# Altium PCB Copy of 2019-07-31_19-54-44.PcbDoc
Units mil, origin at the board's own origin, x right, y up, seen from the top; angles counter-clockwise.
Board outline 1400 x 2000 mil, 4 copper layers (Top Layer, MidLayer1, MidLayer2, Bottom Layer); 12 components, 5 nets, 24 pads, 20 vias.
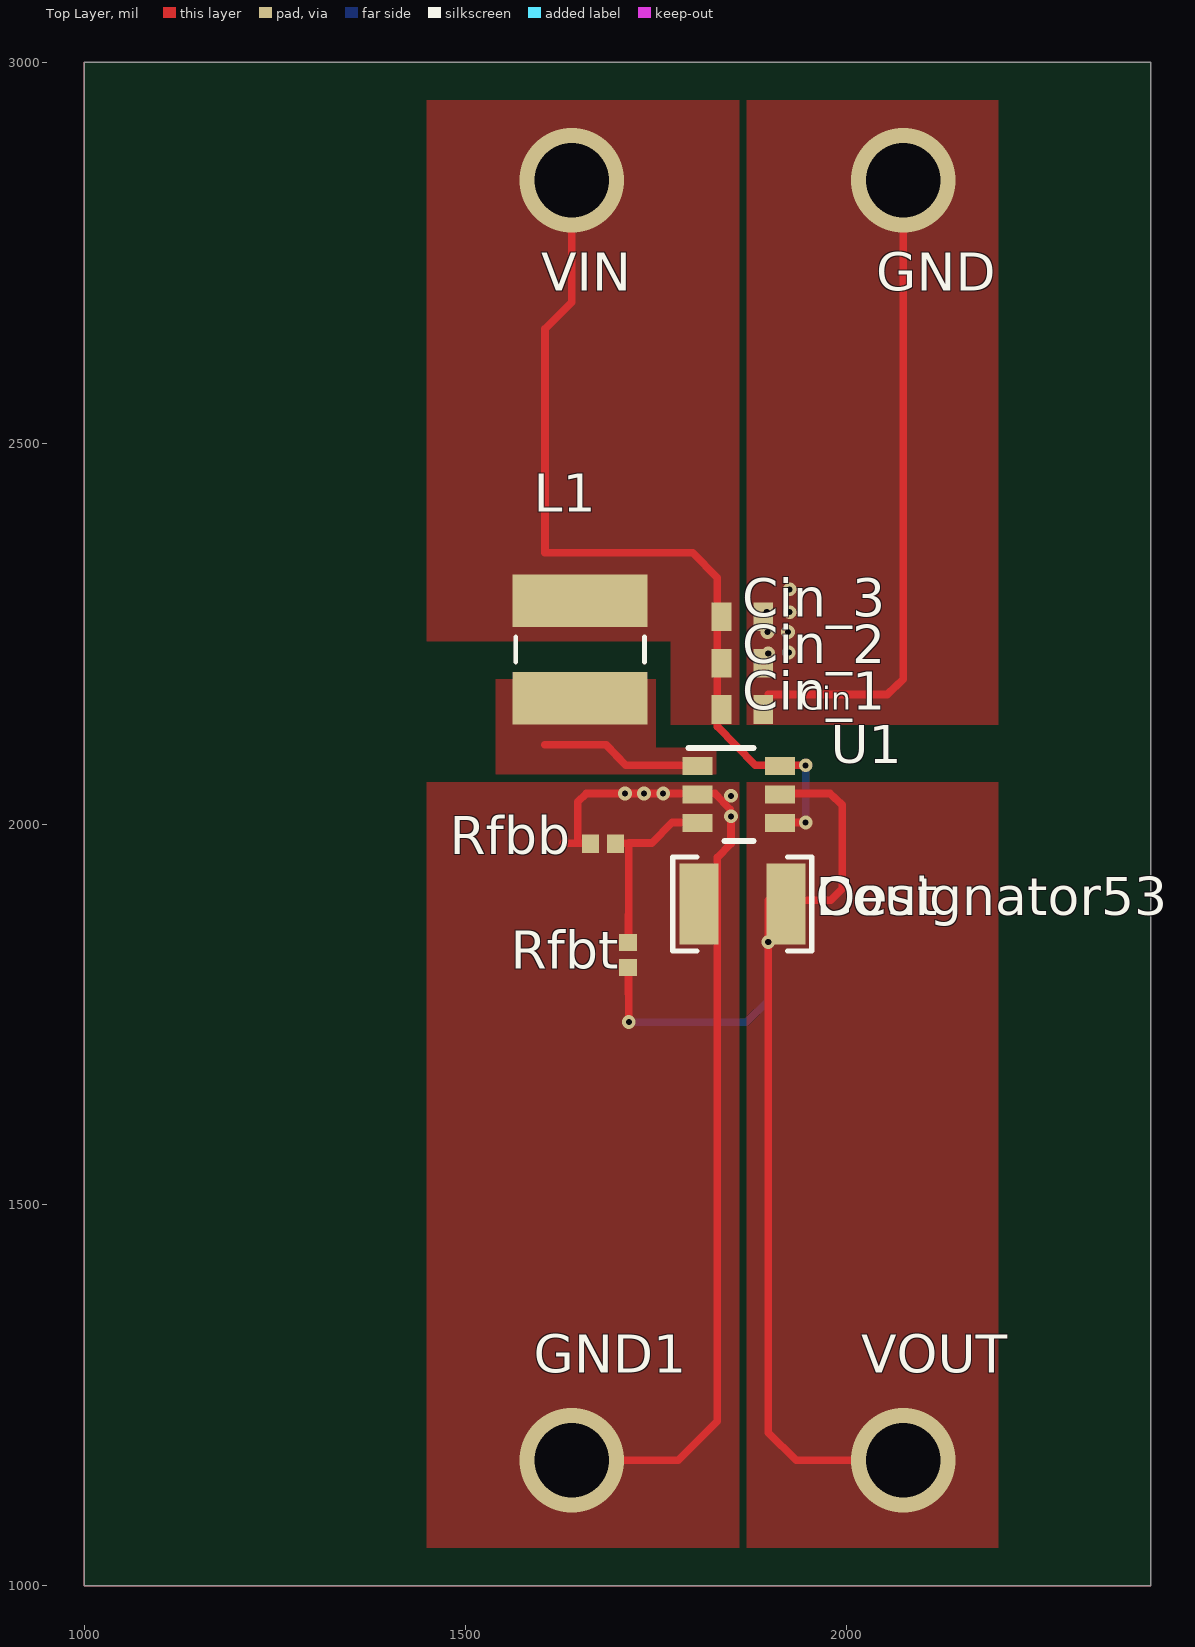
[diagram p0: Top Layer view]
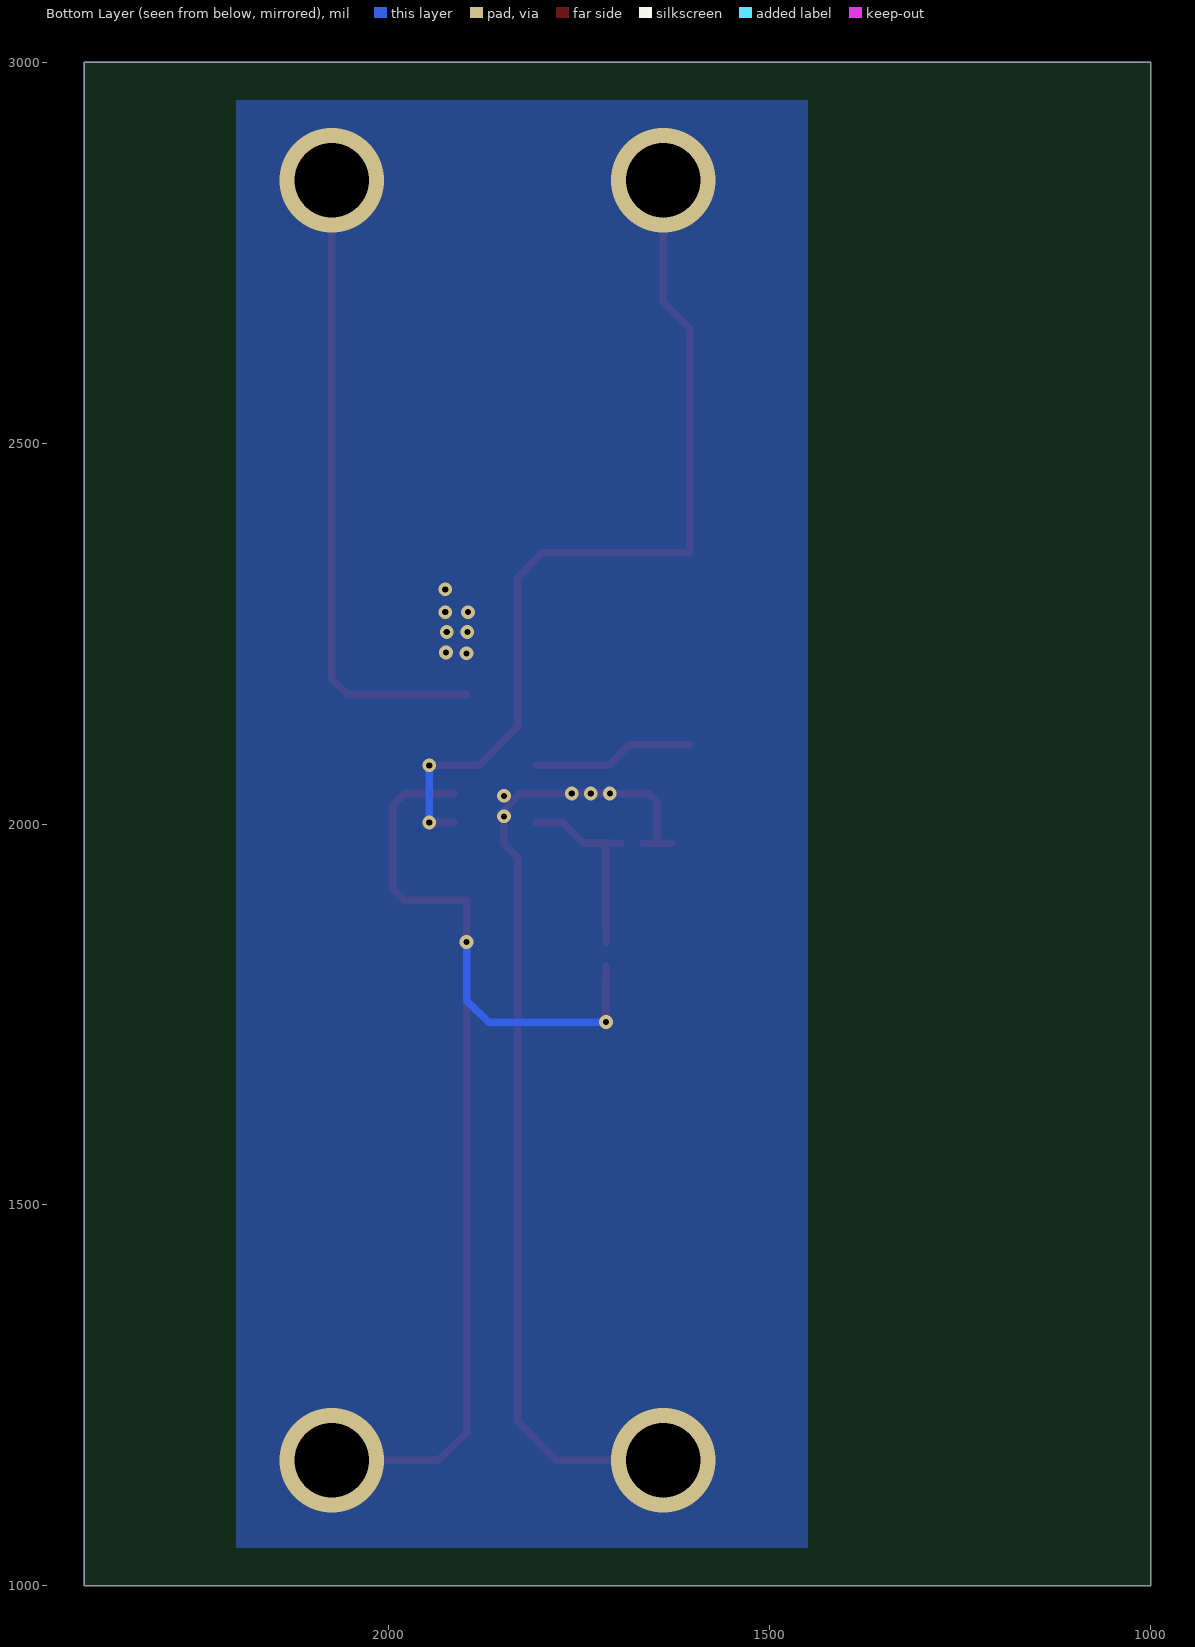
[diagram p1: Bottom Layer view, seen from below]

## Layer stack, top to bottom
Top Solder: solder mask 0.4, Solder Resist, Dk 3.5
Top Layer: signal copper 1.4
Dielectric1: core 12.6, FR-4, Dk 4.8
MidLayer1: signal copper 1.4
Dielectric2: prepreg 12.6, FR-4, Dk 4.8
MidLayer2: signal copper 1.4
Dielectric3: core 12.6, FR-4, Dk 4.8
Bottom Layer: signal copper 1.4
Bottom Solder: solder mask 0.4, Solder Resist, Dk 3.5

## Board outline
1000,1000 2400,1000 2400,3000 1000,3000

## Design rules (kind name [scope] priority, off if disabled: settings)
Clearance [All] p1: gap=10 ignorepadtopadclearanceinfootprint=FALSE except(0: Arc-Hole Track-Hole SMDPad-Hole THPad-Hole Via-Hole Fill-Hole Poly-Hole Region-Hole Text-Hole)
PlaneConnect [All] p1: planeconnectstyle=Direct reliefexpansion=20 reliefentries=4 reliefconductorwidth=10 reliefairgap=10
PolygonConnect [All] p1: connectstyle=Direct reliefconductorwidth=10 reliefentries=4 polygonreliefangle="90 Angle" airgapwidth=10
RoutingVias [All] p1: holewidth=28 width=50 viastyle="Through Hole" minholewidth=28 minwidth=50 maxholewidth=28 maxwidth=50
SolderMaskExpansion [All] p1: expansion=4
Width [All] p1: maxlimit=10 minlimit=10 preferedwidth=10
29 further rules are at their usual default settings.

## Components (designator, comment, footprint, x,y, rotation, side; value= is the part's Value field where it differs from the comment)
Cin_1 "Comment" 0603 1864,2150 r0 top
Cin_2 "Comment" 0603 1864,2211 r0 top
Cin_3 "Comment" 0603 1864,2272 r0 top
Cout "Comment" 1210_270 1864,1895 r180 top
GND "Comment" TP-1502 2074,2844 r270 top
GND1 "Comment" TP-1502 1639,1164 r270 top
L1 "Comment" IND_NPI43C 1651,2229 r270 top
Rfbb "Comment" 0402 1681,1974 r180 top
Rfbt "Comment" 0402 1714,1828 r90 top
U1 "Comment" DBV0006A 1859,2039 r0 top
VIN "Comment" TP-1502 1639,2844 r270 top
VOUT "Comment" TP-1502 2074,1164 r270 top

## Footprints (in the part's own frame and the unit in brackets; to place one, negate y for a bottom-side part, rotate by r counter-clockwise, add the part's x,y. Pads: shape width x height; smd on the part's side, far side on the other; paste and mask are expansions set on the pad)
0402 [mil]
  rect 22x24 smd: 1(-16.5,0) 2(16.5,0)
0603 [mil]
  rect 26x38 smd: 1(-27.5,0) 2(27.5,0)
1210_270 [mm]
  rect 1.3x2.7 smd: 1(-1.45,0) 2(1.45,0)
  silkscreen extent -2.32,-1.57 2.32,1.57
DBV0006A [mm]
  rect 1x0.6 smd: 1(-1.375,0.95) 2(-1.375,0) 3(-1.375,-0.95) 4(1.375,-0.95) 5(1.375,0) 6(1.375,0.95)
  silkscreen extent -1.68,-1.55 0.5,1.55
IND_NPI43C [mil]
  rect 69x177 smd: 1(-64,0) 2(64,0)
  silkscreen extent -16,-84 16,84
TP-1502 [mil]
  round 65 / inner round 0 / far side round 65 hole 32 unplated: 1(0,0)

## Via types
v1: diameter 18/18/18/18 (per signal layer), hole 8, Top Layer to Bottom Layer, 16 vias
v2: diameter 137/137/137/137 (per signal layer), hole 98, Top Layer to Bottom Layer, 4 vias

## Nets (pads, with @x,y where several pads share a name; then routed paths per layer and width w, separated by ;. In a path a pad name is that pad's centre, name@x,y a point inside that pad or via, vN(x,y) a via of type N, cw(c..) or ccw(c..) an arc to the next point about the centre after c; other vN are vias at no path point)
0: Cin_1.2 Cin_2.2 Cin_3.2 Cout.2 GND1.1 GND.1 Rfbb.2 U1.2 | length 2158.1
  Top Layer w10: 1629,1974.5 Rfbb.2@1666,1974.5 ; v2(1640,1165) 1780,1165 1831,1216 1831,1900 1831,1956 1849,1974 v1(1849,2010) ; 1648,1975 1648,2029 1659,2040 v1(1735,2040) 1806,2040 1828,2040 1848,2019 ; 1898,2170 2054,2170 2075,2190 2075,2844 v2(2075,2845)
  other v1: 1849,2037 1710,2040 1760,2040 1898,2224 1925,2225 1897,2252 1924,2252 1896,2278 1926,2278 1926,2308
2: Cin_1.1 Cin_2.1 Cin_3.1 L1.1 U1.4 U1.6 VIN.1 | length 1183.9
  Top Layer w10: v2(1640,2845) 1640,2685 1605,2650 1605,2356 1799,2356 1831,2323 1831,2170 1831,2128 1881,2077 1914,2077 v1(1947,2077) ; U1.4@1914,2002 v1(1947,2002)
  Bottom Layer w10: v1(1947,2002) v1(1947,2077)
3: Cout.1 Rfbt.1 U1.5 VOUT.1 | length 1554.1
  Top Layer w10: 1714.5,1777 Rfbt.1@1714.5,1814 ; v1(1715,1740) 1715,1795 ; U1.5@1914,2040 1979,2040 1995,2025 1995,1915 1980,1900 1898,1900 v1(1898,1845) 1898,1201 1935,1165 v2(2075,1165)
  Bottom Layer w10: v1(1715,1740) 1869,1740 1898,1768 v1(1898,1845)
4: Rfbb.1 Rfbt.2 U1.3 | length 289.2
  Top Layer w10: Rfbb.1@1696,1974.5 1733,1974.5 ; Rfbt.2@1714.5,1844 1714.5,1881 ; 1715,1862 1715,1974 1715,1975 1745,1975 1772,2002 U1.3@1806,2002
5: L1.2 U1.1 | length 212.5
  Top Layer w10: 1605,2104 1685,2104 1711,2077 U1.1@1806,2077

## Polygon pours and split planes (outlines as drawn)
0 on Top Layer "Top Layer-No Net" (solid, pour order 5): 2200,2950 2200,2130 1870,2130 1870,2950
0 on Top Layer "Top Layer-No Net" (solid, pour order 4): 1860,2055 1450,2055 1450,1050 1860,1050
3 on Top Layer "Top Layer-No Net" (solid, pour order 2): 2200,2055 1870,2055 1870,1050 2200,1050
2 on Top Layer "Top Layer-No Net" (solid, pour order 1): 1860,2950 1860,2130 1770,2130 1770,2240 1450,2240 1450,2950
5 on Top Layer "Top Layer-No Net" (solid, pour order 0): 1830,2065 1540,2065 1540,2190 1750,2190 1750,2100 1830,2100
0 on Bottom Layer "Top Layer-No Net" (solid, pour order 3): 2200,2950 2200,1050 1450,1050 1450,2950

## Other copper
Multi-Layer:
  the board outline again, w1

## Silkscreen, mask and mechanical layers (free items; w line width, h text height)
Top Overlay:
  text "Cin" at 1940,2150 h30

## Text inside footprints (layer, text, board x,y; h text height)
Cout: Top Overlay "Designator53" at 1960,1880 h50